# EAGLE board Atmega1284 (EAGLE 8.4.1)
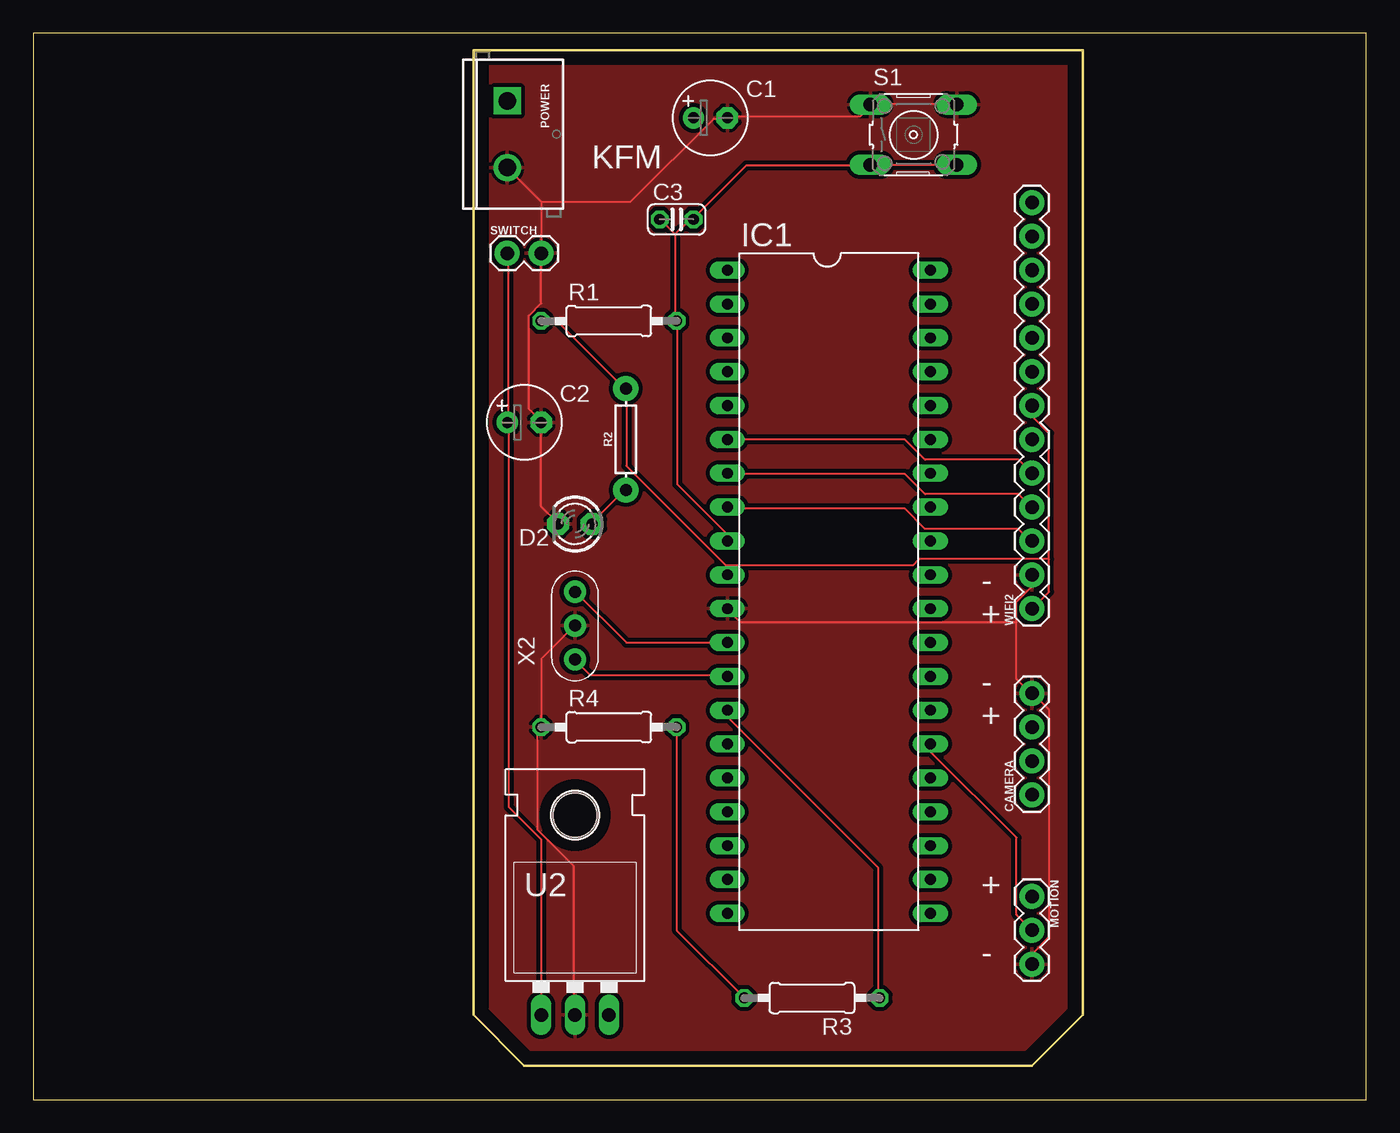
[diagram p0: board, top side]
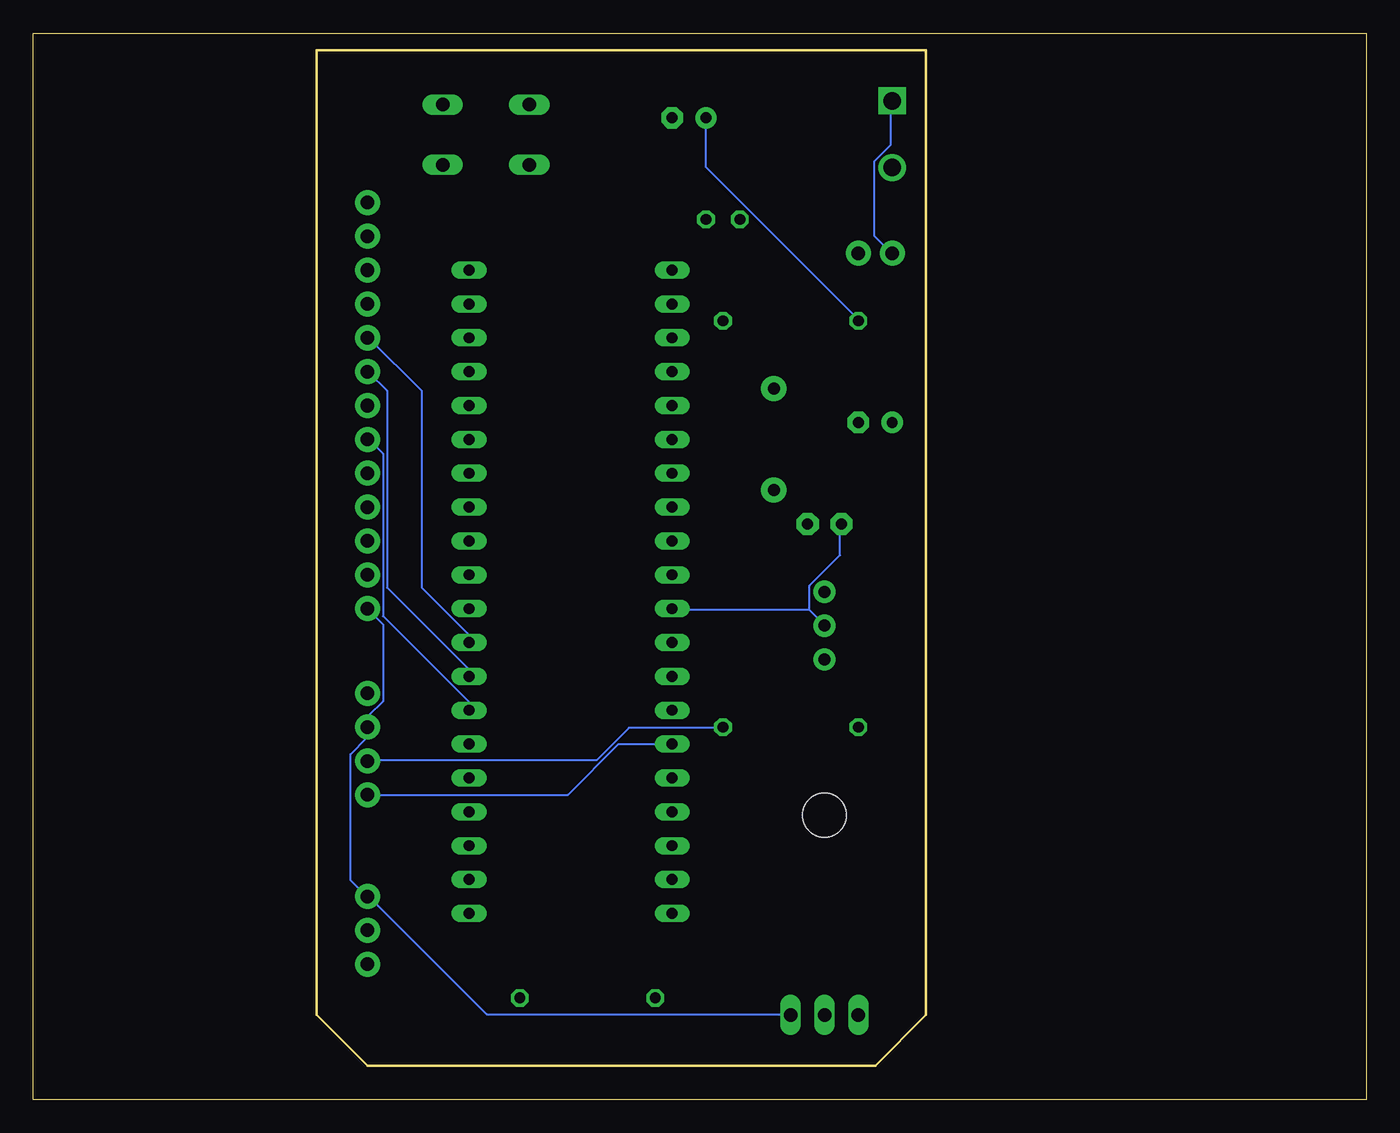
[diagram p1: board, bottom side, seen from below]

Size 100 x 80 mm. Coordinates in mm from the lower left corner, seen from the top.
Outline: 0,0 100,0 100,80 0,80 0,0
Outline: 33.02,78.74 33.02,6.35 36.83,2.54 74.93,2.54 78.74,6.35 78.74,78.74 33.02,78.74
Copper layers (1*16): Top 0.035mm / dielectric 1.5mm / Bottom 0.035mm
Design rules "default": minimum track width 6mil, minimum drill 0.35mm, track to track 6mil, track to pad 6mil, pad to pad 6mil, via to via 6mil, smd to smd 6mil, copper to edge 40mil, drill to drill 6mil, minimum pad ring 10mil, minimum via ring 8mil, stop-mask expansion 4mil, vias tented up to drill 0mil, thermal gap 10mil

## Footprints (pad centres in the part's own frame; a part is rotated, then mirrored left to right if it is on the bottom)
E2,5-6 = drill 0.813 pad 1.6: + -1.27,0 | drill 0.813 pad 1.6 octagon: - 1.27,0
C025-024X044 = drill 0.813 octagon: 1 -1.27,0; 2 1.27,0
1X04 = drill 1.016 pad 1.88: 1 0,0; 2 2.54,0; 3 5.08,0; 4 7.62,0
LED3MM = drill 0.813 pad 1.676 octagon: A -1.27,0; K 1.27,0
DIL40 = drill 0.813 long: 1 -24.13,-7.62; 2 -21.59,-7.62; 3 -19.05,-7.62; 4 -16.51,-7.62; 5 -13.97,-7.62; 6 -11.43,-7.62; 7 -8.89,-7.62; 8 -6.35,-7.62; 9 -3.81,-7.62; 10 -1.27,-7.62; 11 1.27,-7.62; 12 3.81,-7.62; 13 6.35,-7.62; 14 8.89,-7.62; 15 11.43,-7.62; 16 13.97,-7.62; 17 16.51,-7.62; 18 19.05,-7.62; 19 21.59,-7.62; 20 24.13,-7.62; 21 24.13,7.62; 22 21.59,7.62; 23 19.05,7.62; 24 16.51,7.62; 25 13.97,7.62; 26 11.43,7.62; 27 8.89,7.62; 28 6.35,7.62; 29 3.81,7.62; 30 1.27,7.62; 31 -1.27,7.62; 32 -3.81,7.62; 33 -6.35,7.62; 34 -8.89,7.62; 35 -11.43,7.62; 36 -13.97,7.62; 37 -16.51,7.62; 38 -19.05,7.62; 39 -21.59,7.62; 40 -24.13,7.62
1X03 = drill 1.016 pad 1.88: 1 0,0; 2 2.54,0; 3 5.08,0
SCREWTERMINAL-5MM-2 = drill 1.3 pad 2.032 square: 1 0,0 | drill 1.3 pad 2.032: 2 5,0
0207/10 = drill 0.813 octagon: 1 -5.08,0; 2 5.08,0
AXIAL-0.3 = drill 0.9 pad 1.88: P$1 -3.81,0; P$2 3.81,0
B3F-10XX = drill 1.016 long: 1 -3.251,2.261; 2 3.251,2.261; 3 -3.251,-2.261; 4 3.251,-2.261
1X02 = drill 1.016 pad 1.88: 1 0,0; 2 2.54,0
TO-220-ALT = drill 1.016 long: GND 0,-3.81; IN -2.54,-3.81; OUT 2.54,-3.81 | hole 3.302: 0,11.176
1X13 = drill 1.016 pad 1.88: 1 0,0; 2 2.54,0; 3 5.08,0; 4 7.62,0; 5 10.16,0; 6 12.7,0; 7 15.24,0; 8 17.78,0; 9 20.32,0; 10 22.86,0; 11 25.4,0; 12 27.94,0; 13 30.48,0
CERM_OSC = drill 0.9 pad 1.676: P$1 -2.54,0; P$2 0,0; P$3 2.54,0

## Placement (x,y rotation side)
C1  10uf  [E2,5-6]  50.8,73.66 0 top
C2  10uf  [E2,5-6]  36.83,50.8 0 top
C3  .1uf  [C025-024X044]  48.26,66.04 0 top
CAMERA  [1X04]  74.93,22.86 90 top
D2  [LED3MM]  40.64,43.18 180 top
FRAME1  FRAME-LETTER  [CREATIVE_COMMONS]  -80.01,55.88 0 top  (outside the outline)
IC1  [DIL40]  59.69,38.1 270 top
MOTION  [1X03]  74.93,15.24 270 top
POWER  [SCREWTERMINAL-5MM-2]  35.56,74.93 270 top
R1  10k  [0207/10]  43.18,58.42 0 top
R2  1k  [AXIAL-0.3]  44.45,49.53 90 top
R3  10k  [0207/10]  58.42,7.62 180 top
R4  10k  [0207/10]  43.18,27.94 0 top
S1  RESET  [B3F-10XX]  66.04,72.39 0 top
SWITCH  [1X02]  35.56,63.5 0 top
U2  [TO-220-ALT]  40.64,10.16 0 top
WIFI2  [1X13]  74.93,36.83 90 top
X2  16.00MHz  [CERM_OSC]  40.64,35.56 90 top

## Library data of the parts
C1-C3 R1 R3 R4 = rcl
CAMERA = SparkFun-Connectors; PROD_ID: CONN-09696
D2 = minimidi
FRAME1 = SparkFun-Aesthetics
IC1 = 1284p-2
MOTION SWITCH WIFI2 = SparkFun-Connectors
POWER = SparkFun-Connectors; SF_SKU: PRT-08432
R2 = SparkFun-Resistors; PROD_ID: RES-08380
S1 = switch-omron
U2 = SparkFun-IC-Power; PROD_ID: VREG-08450; SF_ID: COM-00107
X2 = digg

## Nets
ANALOG0: IC1.40
ANALOG1: IC1.39
ANALOG2: IC1.38
ANALOG3: IC1.37
ANALOG4: IC1.36
ANALOG5: IC1.35
ANALOG6: IC1.34
ANALOG7: IC1.33
CLOCK: IC1.8 WIFI2.3
DIGITAL0: IC1.1
DIGITAL1: IC1.2
DIGITAL3: IC1.3
DIGITAL4: IC1.4
DIGITAL5: IC1.5
DIGITAL12: IC1.18
DIGITAL13: IC1.19
DIGITAL14: IC1.20
DIGITAL15: IC1.21
DIGITAL16: IC1.22
DIGITAL17: IC1.23
DIGITAL18: IC1.24
DIGITAL19: IC1.25
DIGITAL20: IC1.26 MOTION.2
DIGITAL21: IC1.27 WIFI2.6
DIGITAL22: IC1.28 WIFI2.8
DIGITAL23: IC1.29 WIFI2.9
GND: C1.- C2.- CAMERA.4 D2.K IC1.11 MOTION.3 POWER.2 R4.1 S1.1 S1.2 SWITCH.2 U2.GND WIFI2.2 X2.P$2
MISO: IC1.7 WIFI2.4
MOSI: IC1.6 WIFI2.5
N$1: C2.+ POWER.1 SWITCH.1 U2.IN
N$3: D2.A R2.P$1
N$4: CAMERA.2 R3.2 R4.2
N$5: IC1.13 X2.P$1
N$6: IC1.12 X2.P$3
RST: C3.1 C3.2 IC1.9 R1.2 S1.3 S1.4
RX: IC1.14 R3.1
RX1: IC1.16
TX: CAMERA.1 IC1.15
TX1: IC1.17
VIN: C1.+ CAMERA.3 IC1.10 MOTION.1 R1.1 R2.P$2 U2.OUT WIFI2.1 WIFI2.7

## Tracks (layer width: path | path; a pad name or v marks a point on that pad's centre or on a via)
CLOCK
  Top 0.152: IC1.8 52.12,44.35 65.38,44.35 66.9,42.82 73.91,42.82 74.83,41.91 WIFI2.3
DIGITAL20
  Top 0.152: MOTION.2 73.76,13.87 73.76,19.66 67.36,26.06 67.36,26.67 IC1.26
DIGITAL21
  Bottom 0.152: IC1.27 67.36,29.26 67.36,29.87 73.76,36.27 73.76,48.46 74.83,49.53 WIFI2.6
DIGITAL22
  Bottom 0.152: IC1.28 67.36,31.85 67.36,32.31 73.46,38.41 73.46,53.19 74.83,54.56 WIFI2.8
DIGITAL23
  Bottom 0.152: IC1.29 67.36,34.29 67.36,34.9 70.87,38.41 70.87,53.19 74.83,57.15 WIFI2.9
GND
  Top 0.152: MOTION.3 74.98,10.21 74.98,10.97 76.2,12.19 76.2,29.26 74.98,30.48 CAMERA.4 74.83,30.48 73.76,31.55 73.76,35.81 | 73.76,35.81 73.76,37.34 74.83,38.41 74.83,39.32 WIFI2.2 | S1.2 69.19,74.68 62.79,74.68 S1.1 62.79,74.52 62.03,73.76 52.12,73.76 C1.- 51.97,73.61 51.05,73.61 44.81,67.36 38.1,67.36 | 38.1,67.36 SWITCH.2 38.1,59.74 37.19,58.83 37.19,51.82 38.1,50.9 C2.- 38.1,44.5 39.32,43.28 D2.K | 38.1,67.36 35.66,69.8 POWER.2 | X2.P$2 40.54,35.51 38.1,33.07 R4.1 38.1,27.89 37.8,27.58 37.8,20.27 40.54,17.53 40.54,6.4 U2.GND | 73.76,35.81 53.03,35.81 52.12,36.73 IC1.11
  Bottom 0.152: 41.76,36.73 51.97,36.73 IC1.11 | 41.76,36.73 40.69,35.66 X2.P$2 | 41.76,36.73 41.76,38.56 39.47,40.84 39.47,43.13 D2.K
  pour Top (isolate 0.305): 33.02,78.74 33.02,6.35 36.83,2.54 74.93,2.54 78.74,6.35 78.74,78.74
MISO
  Top 0.152: IC1.7 52.12,46.94 65.38,46.94 66.9,45.41 73.91,45.41 74.83,44.5 WIFI2.4
MOSI
  Top 0.152: IC1.6 65.38,49.53 66.9,48.01 73.91,48.01 WIFI2.5
N$1
  Top 0.152: U2.IN 38.1,19.51 35.66,21.95 35.66,50.75 C2.+ 35.66,50.9 35.66,63.4 SWITCH.1
  Bottom 0.152: POWER.1 35.66,74.83 35.66,71.63 36.88,70.41 36.88,64.77 35.66,63.55 SWITCH.1
N$3
  Top 0.152: D2.A 41.91,43.28 44.35,45.72 R2.P$1
N$4
  Top 0.152: R3.2 48.31,12.65 48.31,27.89 R4.2
  Bottom 0.152: CAMERA.2 74.83,25.45 57.76,25.45 55.32,27.89 48.31,27.89 R4.2
N$5
  Top 0.152: IC1.13 51.97,31.85 41.76,31.85 40.69,32.92 X2.P$1
N$6
  Top 0.152: IC1.12 44.5,34.29 40.69,38.1 X2.P$3
RST
  Top 0.152: 62.79,70.1 69.19,70.1 S1.4 | 48.16,64.92 48.16,58.52 R1.2 48.31,58.37 48.31,46.18 51.97,42.52 51.97,41.91 IC1.9 | 48.16,64.92 47.09,65.99 C3.1 | 48.16,64.92 49.23,65.99 49.53,65.99 C3.2 49.53,66.14 53.49,70.1 62.79,70.1 | 62.79,70.1 S1.3
RX
  Top 0.152: IC1.14 52.12,29.11 52.12,28.65 63.4,17.37 63.4,7.62 R3.1
TX
  Bottom 0.152: IC1.15 56.08,26.67 59.89,22.86 CAMERA.1
VIN
  Top 0.152: 51.97,40.08 51.97,39.47 IC1.10 | 51.97,40.08 44.5,47.55 44.5,53.34 R2.P$2 44.35,53.34 39.32,58.37 38.1,58.37 R1.1 | 76.2,40.54 76.2,38.1 WIFI2.1 | 76.2,40.54 76.2,49.99 74.98,51.21 74.98,51.97 WIFI2.7 | 51.97,40.08 65.99,40.08 66.45,40.54 76.2,40.54
  Bottom 0.152: C1.+ 49.53,69.95 38.1,58.52 R1.1 | WIFI2.1 73.76,35.66 73.76,29.87 74.83,28.8 74.83,28.04 CAMERA.3 74.98,27.89 74.98,27.13 76.2,25.91 76.2,16.46 74.98,15.24 MOTION.1 74.83,15.24 65.99,6.4 43.28,6.4 U2.OUT

## Text on the board
tPlace: KFM | - | + | - | + | + | -